# Altium PCB PCB_INTER.PcbDoc
Units mm, origin at the board's own origin, x right, y up, seen from the top; angles counter-clockwise.
Board outline 35 x 54.6 mm, 2 copper layers (Top Layer, Bottom Layer); 20 components, 25 nets, 105 pads, 4 vias.
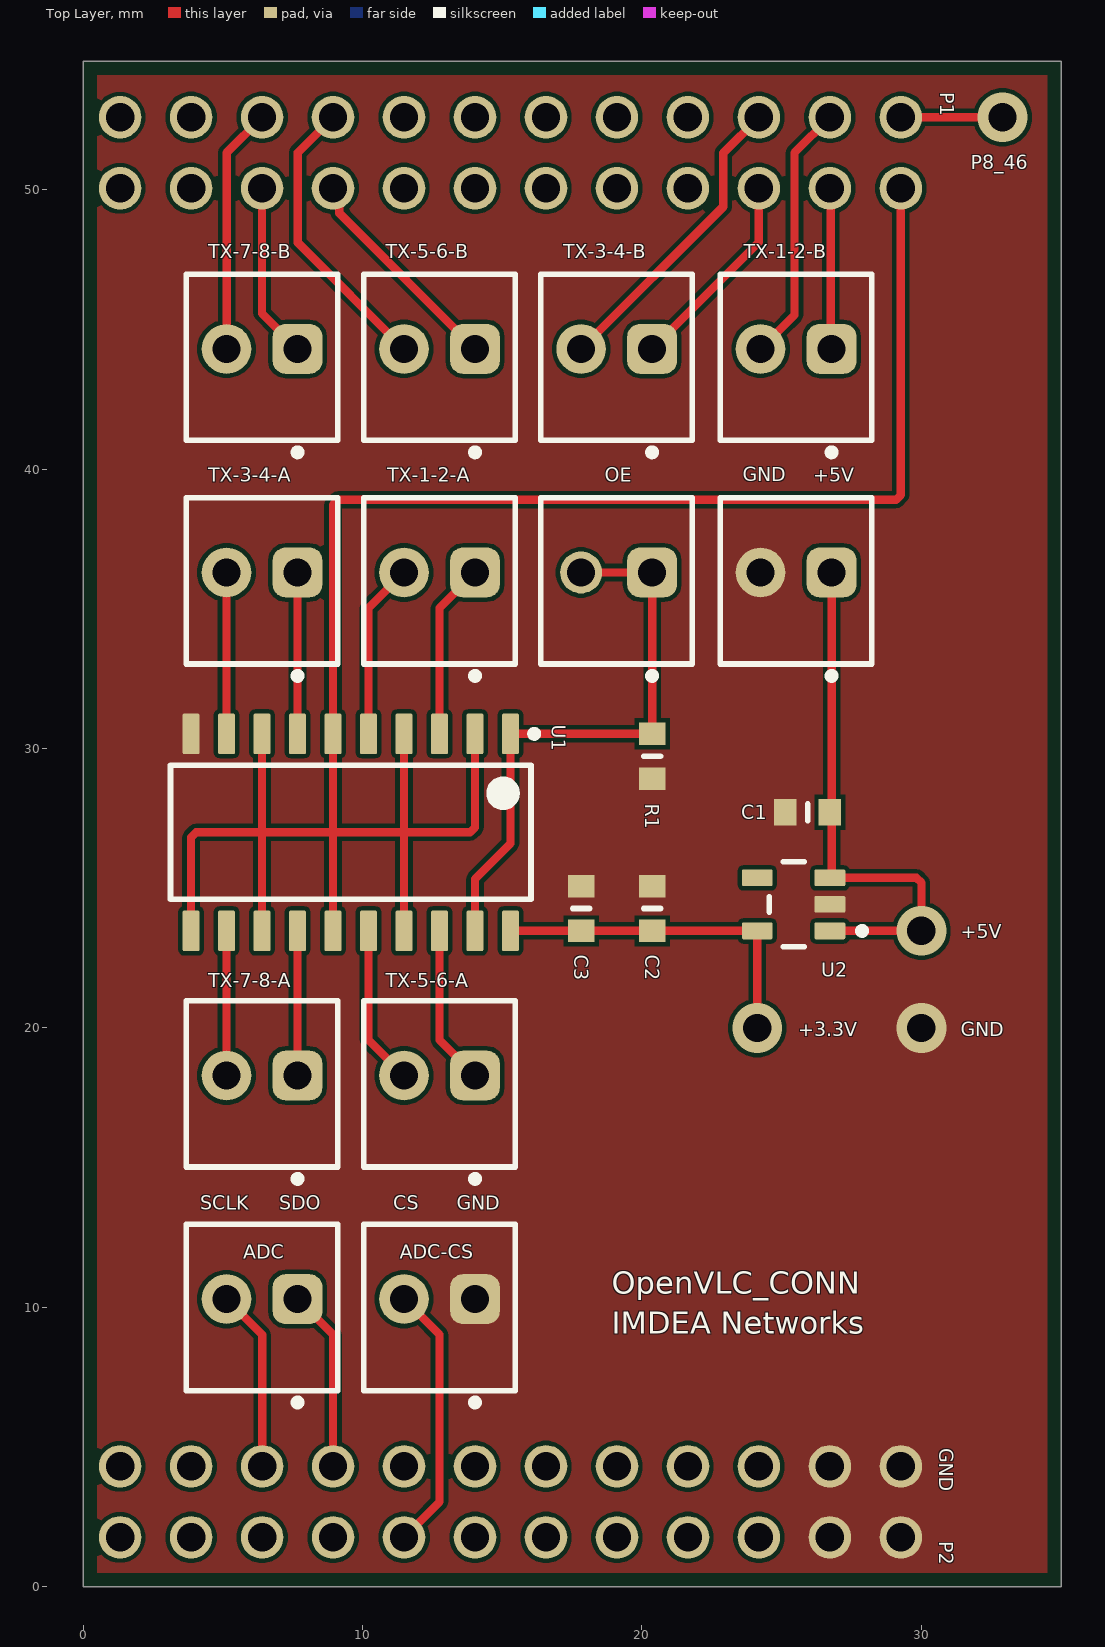
[diagram p0: Top Layer view]
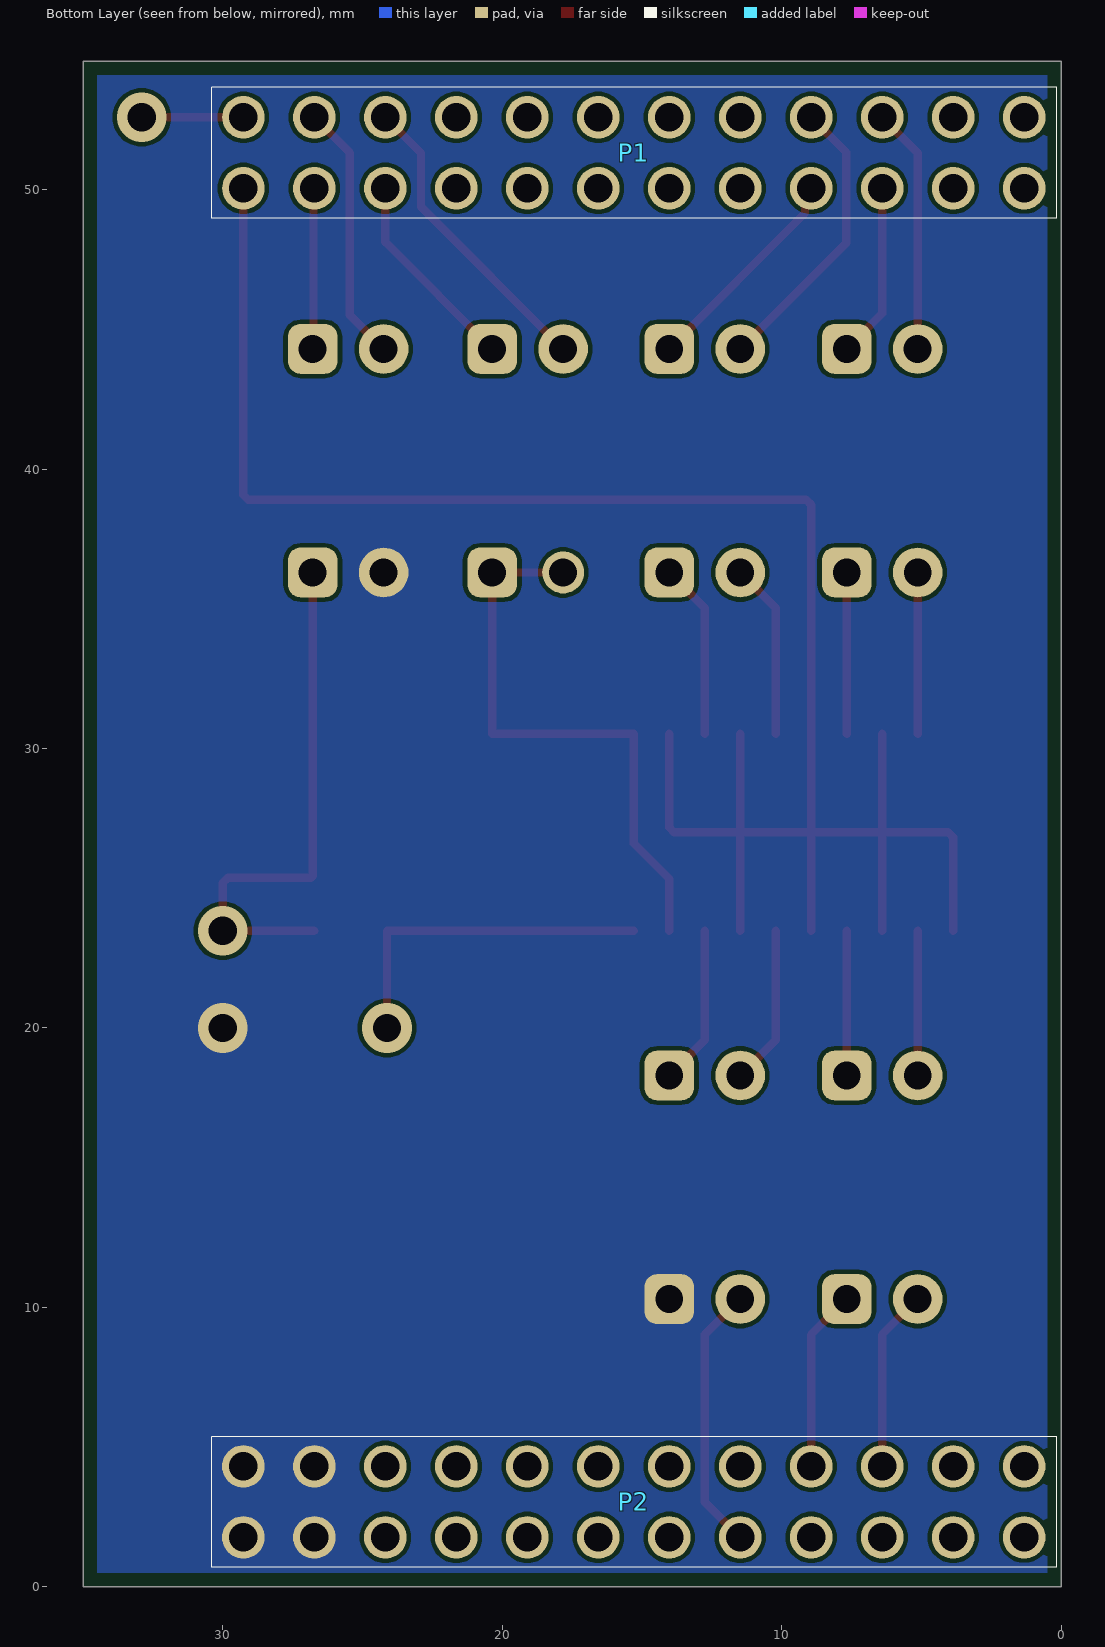
[diagram p1: Bottom Layer view, seen from below]
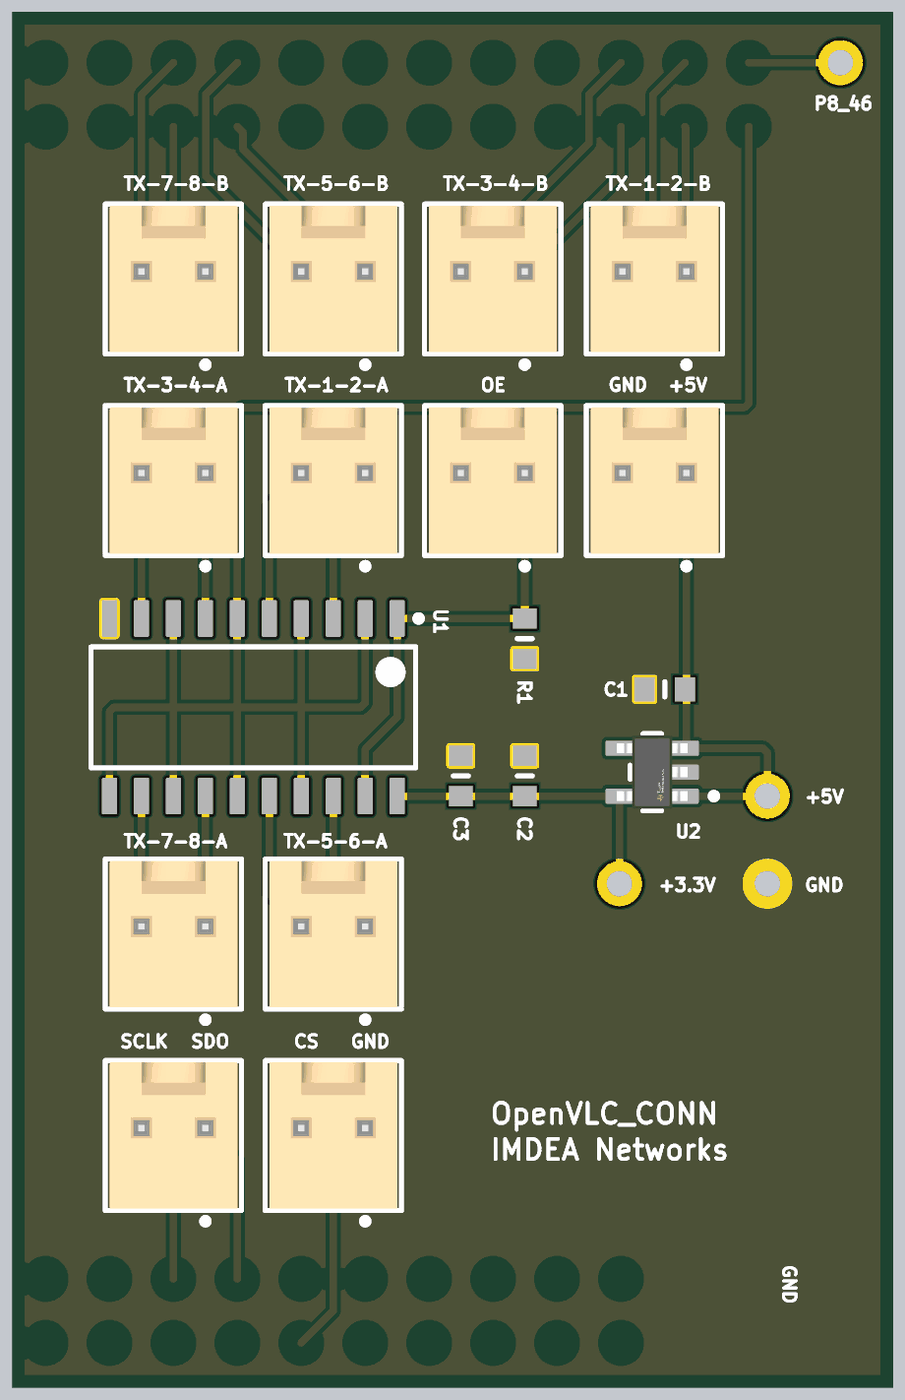
[diagram p2: 3D render of the assembled board from above, using the file's embedded part models]

## Layer stack, top to bottom
Top Solder: solder mask 0.0102, Solder Resist, Dk 3.5
Top Layer: signal copper 0.07
Dielectric1: dielectric 0.32, FR-4, Dk 4.8
Bottom Layer: signal copper 0.07
Bottom Solder: solder mask 0.0102, Solder Resist, Dk 3.5

## Board outline
0,0 0,54.6 35,54.6 35,0

## Design rules (kind name [scope] priority, off if disabled: settings)
Clearance Clearance_1 [(InNet('GND') AND InComponent('DC-DC'))] p1: gap=0.5 ignorepadtopadclearanceinfootprint=FALSE except(0: Arc-Hole Track-Hole SMDPad-Hole THPad-Hole Via-Hole Fill-Hole Poly-Hole Region-Hole Text-Hole)
Clearance [All] p2: gap=0.15 ignorepadtopadclearanceinfootprint=FALSE except(0: Arc-Hole Track-Hole SMDPad-Hole THPad-Hole Via-Hole Fill-Hole Poly-Hole Region-Hole Text-Hole)
DiffPairsRouting [All] p1: maxlimit=0.3 minlimit=0.3 mostfreqgap=0.3 toplayer_minwidth=0.381 toplayer_maxwidth=0.381 toplayer_prefwidth=0.381 bottomlayer_minwidth=0.381 bottomlayer_maxwidth=0.381 bottomlayer_prefwidth=0.381 maxuncoupledlength=12.7
HoleSize [All] p1: absolutevalues=TRUE maxlimit=2.54 minlimit=0.25 maxpercent=80.000 minpercent=20.000
MinimumSolderMaskSliver [All] p1: minsoldermaskwidth=0.15
PlaneClearance [All] p1: clearance=0.5
PlaneConnect [All] p1: planeconnectstyle=Direct reliefexpansion=0.508 reliefentries=4 reliefconductorwidth=0.254 reliefairgap=0.254
PolygonConnect PolygonConnect_1 [IsVia & InNet('GND')] p1: connectstyle=Direct reliefconductorwidth=0.254 reliefentries=4 polygonreliefangle="90 Angle" airgapwidth=0
PolygonConnect [All] p2: connectstyle=Direct reliefconductorwidth=0.254 reliefentries=4 polygonreliefangle="90 Angle" airgapwidth=0.254
RoutingVias [All] p1: holewidth=0.711 width=1.27 viastyle="Through Hole" minholewidth=25 minwidth=0.55 maxholewidth=0.711 maxwidth=1.27
SMDNeckDown [All] p1: percent=80.000
SilkToSilkClearance [All] p1: silktosilkclearance=0.15
SilkToSolderMaskClearance [IsPad] p1: minsilkscreentomaskgap=0.15 clearancetoexposedcopper=TRUE
SolderMaskExpansion [All] p1: expansion=0.102 istentingtop=FALSE
SupplyNets "Schematic Supply Nets_5" [InNet('+5V')] p1: voltage=0.000
SupplyNets "Schematic Supply Nets_2" [InNet('+3.3V')] p2: voltage=0.000
SupplyNets "Schematic Supply Nets" [InNet('GND')] p3: voltage=0.000
Width [All] p1: maxlimit=0.5 minlimit=0.15 preferedwidth=0.3 minimp=50.000000 maximp=50.000000 favimp=50.000000
23 further rules are at their usual default settings.

## Components (designator, comment, footprint, x,y, rotation, side; value= is the part's Value field where it differs from the comment)
+5V "61900211121" 61900211121#1 25.514,36 r0 top
ADC "61900211121" 61900211121#1 6.403,10 r0 top
ADC-CS "61900211121" 61900211121#1 12.754,10 r0 top
C1 "GRM188R6YA106MA73D" RESC1608X55N 25.925,27.716 r180 top value=10uF
C2 "GRM188R6YA106MA73D" RESC1608X55N 20.361,24.275 r270 top value=10uF
C3 "GCM188R71H104KA57J" RESC1608X55N 17.821,24.275 r90 top value=100nF
OE "61900211121" 61900211121#2 19.091,36 r0 top
P1 "61302421121" BBB_CAPE_NO_HEADER_R_24 57.204,50.049 r0 bottom
P2 "61302421121" BBB_CAPE_NO_HEADER_R_24 57.205,1.771 r0 bottom
R1 "RT0603BRD0710KL" RESC1608X55N 20.361,29.725 r270 top value=10k
TX-1-2-A "61900211121" 61900211121#1 12.754,36 r0 top
TX-1-2-B "61900211121" 61900211121#1 25.514,44 r0 top
TX-3-4-A "61900211121" 61900211121#1 6.403,36 r0 top
TX-3-4-B "61900211121" 61900211121#1 19.091,44 r0 top
TX-5-6-A "61900211121" 61900211121#1 12.754,18 r0 top
TX-5-6-B "61900211121" 61900211121#1 12.754,44 r0 top
TX-7-8-A "61900211121" 61900211121#1 6.403,18 r0 top
TX-7-8-B "61900211121" 61900211121#1 6.403,44 r0 top
U1 "SN74HC244NSR" NS0020A_L 9.578,27 r270 top
U2 "TPS7A2433DBVR" FP-DBV0005A-MFG 25.424,24.425 r180 top

## Footprints (in the part's own frame and the unit in brackets; to place one, negate y for a bottom-side part, rotate by r counter-clockwise, add the part's x,y. Pads: shape width x height; smd on the part's side, far side on the other; paste and mask are expansions set on the pad)
61900211121#1 [mm] "2.54mm Male Locking Header, 2p"
  rrect50% 1.778x1.778 hole 1: 1(1.27,0.3)
  round 1.778 hole 1: 2(-1.27,0.3)
  silkscreen extent -2.71,-3.52 2.71,2.98, body extent -2.54,-2.9 2.54,2.9, height 11.53
61900211121#2 [mm] "2.54mm Male Locking Header, 2p"
  rrect50% 1.778x1.778 hole 1: 1(1.27,0.3)
  round 1.5 hole 1: 2(-1.27,0.3)
  silkscreen extent -2.71,-3.52 2.71,2.98, body extent -2.54,-2.9 2.54,2.9, height 11.53
BBB_CAPE_NO_HEADER_R_24 [mil] "46-pin male header for BeagleBone Black P8,P9"
  round 60 hole 40: 23(-1100,0) 24(-1100,-100) 25(-1200,0) 26(-1200,-100) 27(-1300,0) 28(-1300,-100) 29(-1400,0) 30(-1400,-100) 31(-1500,0) 32(-1500,-100) 33(-1600,0) 34(-1600,-100) 35(-1700,0) 36(-1700,-100) 37(-1800,0) 38(-1800,-100) 39(-1900,0) 40(-1900,-100) 41(-2000,0) 42(-2000,-100) 43(-2100,0) 44(-2100,-100) 45(-2200,0) 46(-2200,-100)
  silkscreen extent -2246,-142 -1056,42
FP-DBV0005A-MFG [mm]
  rrect17% 1.1x0.6 smd paste+0 mask+0: 1(-1.3,0.95) 2(-1.3,0) 3(-1.3,-0.95) 4(1.3,-0.95) 5(1.3,0.95)
  silkscreen extent -2.58,-1.53 0.87,1.53, body extent -1.95,-1.78 1.95,1.78, height 0.25
NS0020A_L [mm] "SOIC,20-Leads,Body 12.9x5.6mm,Pitch 1.27mm,IPC High Density"
  rrect17% 1.45x0.6 smd: 1(-3.525,5.715) 2(-3.525,4.445) 3(-3.525,3.175) 4(-3.525,1.905) 5(-3.525,0.635) 6(-3.525,-0.635) 7(-3.525,-1.905) 8(-3.525,-3.175) 9(-3.525,-4.445) 10(-3.525,-5.715) 11(3.525,-5.715) 12(3.525,-4.445) 13(3.525,-3.175) 14(3.525,-1.905) 15(3.525,-0.635) 16(3.525,0.635) 17(3.525,1.905) 18(3.525,3.175) 19(3.525,4.445) 20(3.525,5.715)
  silkscreen extent -3.65,-6.45 2.4,6.69, body extent -2.8,-6.45 2.8,6.45, height 2
RESC1608X55N [mm]
  rect 0.8x0.95 smd: 1(-0.8,0) 2(0.8,0)
  silkscreen extent 0,-0.3 0,0.3

## Part data
+5V ADC ADC-CS OE TX-1-2-A TX-1-2-B TX-3-4-A TX-3-4-B TX-5-6-A TX-5-6-B TX-7-8-A TX-7-8-B: library part CMP-1502-00584-3, Color=Beige, Contact Resistance=20mΩ, Current Rating=3A, Flammability Rating="UL94 V-0", Insulation Resistance=1GΩ, Max Operating Temperature=105°C, Min Operating Temperature=-40°C, Operating Supply Voltage=250V, Connector Type="Male Pin", Contact Gender=Male, Contact Material=Copper, Contact Mating Length=7.493mm, Contact Plating=Tin, Fastening Type=Friction, Gender=Male, Height=11.75mm, Housing Material=Nylon, Lead Pitch=2.54mm, Length=5.08mm, Mount="Through Hole", NexarPartId=18818218, Number of Contacts=2, Number of Pins=2, Number of Positions=2, Number of Rows=1, Orientation=Vertical, Packaging=Bulk, Pitch=2.54mm, REACH SVHC=Unknown, RoHS=Compliant, Termination="Through Hole", Voltage Rating=250V, Width=5.12mm
C1 C2 C3: library part Cap, "Capacitor", LatestRevisionDate=17-Jul-2002, LatestRevisionNote="Re-released for DXP Platform.", PackageDescription="Radial Cap, Thru-Hole; 2 Leads; 0.3 in Pin Spacing", PackageReference=RAD-0.3, Published=8-Jun-2000, Publisher="Altium Limited"
P1: library part BBB_P8_reduced
P2: library part BBB_P9_reduced
R1: library part Res1, "Resistor", LatestRevisionDate=17-Jul-2002, LatestRevisionNote="Re-released for DXP Platform.", PackageDescription="Axial Device, Thru-Hole; 2 Leads; 0.3 in Pin Spacing", PackageReference=AXIAL-0.3, Published=8-Jun-2000, Publisher="Altium Limited"
U1: library part CMP-0440-01058-3, "Octal Buffers And Line Drivers With 3-State Outputs, NS0020A, LARGE T&R", F @ Nom Voltage(Max)(Mhz)=28, Generic Part Number=SN74HC244, ICC @ Nom Voltage(Max)(mA)=0.08, Manufacturer="Texas Instruments", Operating Temperature Range(C)="-40 to 85", Rating=Catalog, tpd @ Nom Voltage(Max)(ns)=29, Voltage(Nom)(V)=6, Bits(#)=8, DatasheetVersion=SCLS130D, Input Type=CMOS, Output Type=CMOS, PackageReference=NS0020A, PackageVersion=http://www.ti.com/lit/ml/msop002a/msop002a.pdf, VCC(Max)(V)=6, VCC(Min)(V)=2
U2: library part CMP-00370-106221451-1, "TPS7A2433DBVR 200-mA, 18-V, ultra-low-IQ, low-dropout (LDO) voltage regulator with enable ; 5-SOT-23 -40 to 125", Case/Package=SOT-23, Manufacturer Lifecycle Status=ACTIVE, Output Voltage=3.3V, Height=1.45mm, Length=2.9mm, Lifecycle Status=Production, NexarPartId=106221451, Number of Channels=1, Number of Pins=5, Thickness=1.2mm, Width=1.6mm

## Via types
v1: diameter 1.778, hole 1.016, Top Layer to Bottom Layer, 4 vias

## Nets (pads, with @x,y where several pads share a name; then routed paths per layer and width w, separated by ;. In a path a pad name is that pad's centre, name@x,y a point inside that pad or via, vN(x,y) a via of type N, cw(c..) or ccw(c..) an arc to the next point about the centre after c; other vN are vias at no path point)
+3.3V: C2.2 C3.1 U1.20 U2.5 | length 12.3
  Top Layer w0.3: U1.20 C3.1 U2.5 v1(24.124,20)
+5V: +5V.1 C1.1 U2.1 U2.3 | length 18.6
  Top Layer w0.3: U2.1 v1(30,23.475) 30,25.199 29.824,25.375 26.844,25.375 26.784,25.435 26.784,27.716 +5V.1@26.784,35.7
CS_PD: ADC-CS.2 P2.37 | length 9.6
  Top Layer w0.3: P2.37 12.754,3.04 12.754,9.03 ADC-CS.2
GND: +5V.2 ADC-CS.1 C1.2 C2.1 C3.2 P2.23 P2.24 P2.25 P2.26 R1.2 U1.10 U2.2
  other v1: 30,20
MISO_PD: ADC.1 P2.40 | length 6.5
  Top Layer w0.3: ADC.1 8.945,9.028 P2.40
MOSI_PD: ADC.2 P2.42 | length 6.5
  Top Layer w0.3: ADC.2 6.405,9.028 P2.42
NetOE_1: OE.1 OE.2 R1.1 U1.1 U1.19 | length 21
  Top Layer w0.3: U1.19 14.023,25.332 15.293,26.602 U1.1 R1.1 OE.1 OE.2
NetTX-1-2-A_1: TX-1-2-A.1 U1.3 | length 6.3
  Top Layer w0.3: U1.3 12.753,35.029 TX-1-2-A.1
NetTX-1-2-A_2: TX-1-2-A.2 U1.5 | length 6.3
  Top Layer w0.3: U1.5 10.213,35.029 TX-1-2-A.2
NetTX-3-4-A_1: TX-3-4-A.1 U1.7 | length 5.8
  Top Layer w0.3: U1.7 TX-3-4-A.1
NetTX-3-4-A_2: TX-3-4-A.2 U1.9 | length 5.8
  Top Layer w0.3: U1.9 TX-3-4-A.2
NetTX-5-6-A_1: TX-5-6-A.1 U1.18 | length 5.7
  Top Layer w0.3: U1.18 12.753,19.571 TX-5-6-A.1
NetTX-5-6-A_2: TX-5-6-A.2 U1.16 | length 5.7
  Top Layer w0.3: U1.16 10.213,19.571 TX-5-6-A.2
NetTX-7-8-A_1: TX-7-8-A.1 U1.14 | length 5.2
  Top Layer w0.3: TX-7-8-A.1 U1.14
NetTX-7-8-A_2: TX-7-8-A.2 U1.12 | length 5.2
  Top Layer w0.3: TX-7-8-A.2 U1.12
P8_27: P1.41 TX-7-8-B.1 | length 6.3
  Top Layer w0.3: P1.41 6.404,45.569 TX-7-8-B.1
P8_28: P1.42 TX-7-8-B.2 | length 8.8
  Top Layer w0.3: TX-7-8-B.2 5.136,44.303 5.136,51.321 P1.42
P8_29: P1.39 TX-5-6-B.1 | length 7.9
  Top Layer w0.3: P1.39 9.167,49.826 9.167,49.157 TX-5-6-B.1
P8_30: P1.40 TX-5-6-B.2 | length 10.4
  Top Layer w0.3: P1.40 7.685,51.33 7.685,48.099 TX-5-6-B.2
P8_41: P1.27 TX-3-4-B.1 | length 7.3
  Top Layer w0.3: TX-3-4-B.1 24.184,48.123 P1.27
P8_42: P1.28 TX-3-4-B.2 | length 10.9
  Top Layer w0.3: TX-3-4-B.2 22.908,49.387 22.908,51.312 P1.28
P8_43: P1.25 TX-1-2-B.1 | length 5.8
  Top Layer w0.3: P1.25 26.754,50.019 26.754,44.33 TX-1-2-B.1
P8_44: P1.26 TX-1-2-B.2 | length 9.3
  Top Layer w0.3: TX-1-2-B.2 25.457,45.513 25.457,51.321 P1.26
P8_45: P1.23 U1.2 U1.4 U1.6 U1.8 U1.11 U1.13 U1.15 U1.17 | length 77.8
  Top Layer w0.3: U1.11 3.863,26.824 4.039,27 6.403,27 ; U1.13 6.403,27 ; U1.8 6.403,27 ; U1.15 8.943,27 ; U1.17 11.483,27 ; U1.4 11.483,27 ; U1.2 14.023,27.176 13.848,27 11.483,27 ; P1.23 29.264,39.076 29.088,38.9 9.119,38.9 8.943,38.724 8.943,27 ; 6.403,27 8.943,27 ; 8.943,27 11.483,27
P8_46: P1.24 | length 3.6
  Top Layer w0.3: P1.24 v1(32.9,52.589)
pads on no net: P1.29 P1.30 P1.31 P1.32 P1.33 P1.34 P1.35 P1.36 P1.37 P1.38 P1.43 P1.44 P1.45 P1.46 P2.27 P2.28 P2.29 P2.30 P2.31 P2.32 P2.33 P2.34 P2.35 P2.36 P2.38 P2.39 P2.41 P2.43 P2.44 P2.45 P2.46 U2.4

## Polygon pours and split planes (outlines as drawn)
GND on Top Layer "GND_L01_P018" (solid, pour order 18): 0.5,0.5 0.5,54.1 34.5,54.1 34.5,0.5
GND on Bottom Layer "GND_L02_P017" (solid, pour order 17): 0.5,0.5 0.5,54.1 34.5,54.1 34.5,0.5

## Silkscreen, mask and mechanical layers (free items; w line width, h text height)
Top Overlay:
  text "P8_46" at 31.766,50.728 h0.5
  text "GND" at 23.6,39.56 h0.5
  text "+5V" at 31.4,23.214 h0.5
  text "+3.3V" at 25.6,19.706 h0.5
  text "GND" at 31.4,19.706 h0.5
  text "SCLK" at 4.2,13.5 h0.5
  text "SDO" at 7.015,13.5 h0.5
  text "CS" at 11.1,13.5 h0.5
  text "GND" at 13.363,13.497 h0.5
  text "OpenVLC_CONN" at 18.912,10.494 h0.8
  text "IMDEA Networks" at 18.912,9.062 h0.8
  text "GND" at 30.634,4.953 h0.5 r270
Mechanical 1:
  the board outline again, w0.254